# Altium PCB leo_power_pcb.PcbDoc (part 3 of 3)
Units mm, origin at the board's own origin, x right, y up, seen from the top; angles counter-clockwise.
Board outline 127 x 85.5 mm, 4 copper layers (TOP_Layer, INT1_GND, INT2_GND, BOTTOM_Layer), stack 1.586 mm thick; 172 components, 108 nets, 524 pads, 275 vias.
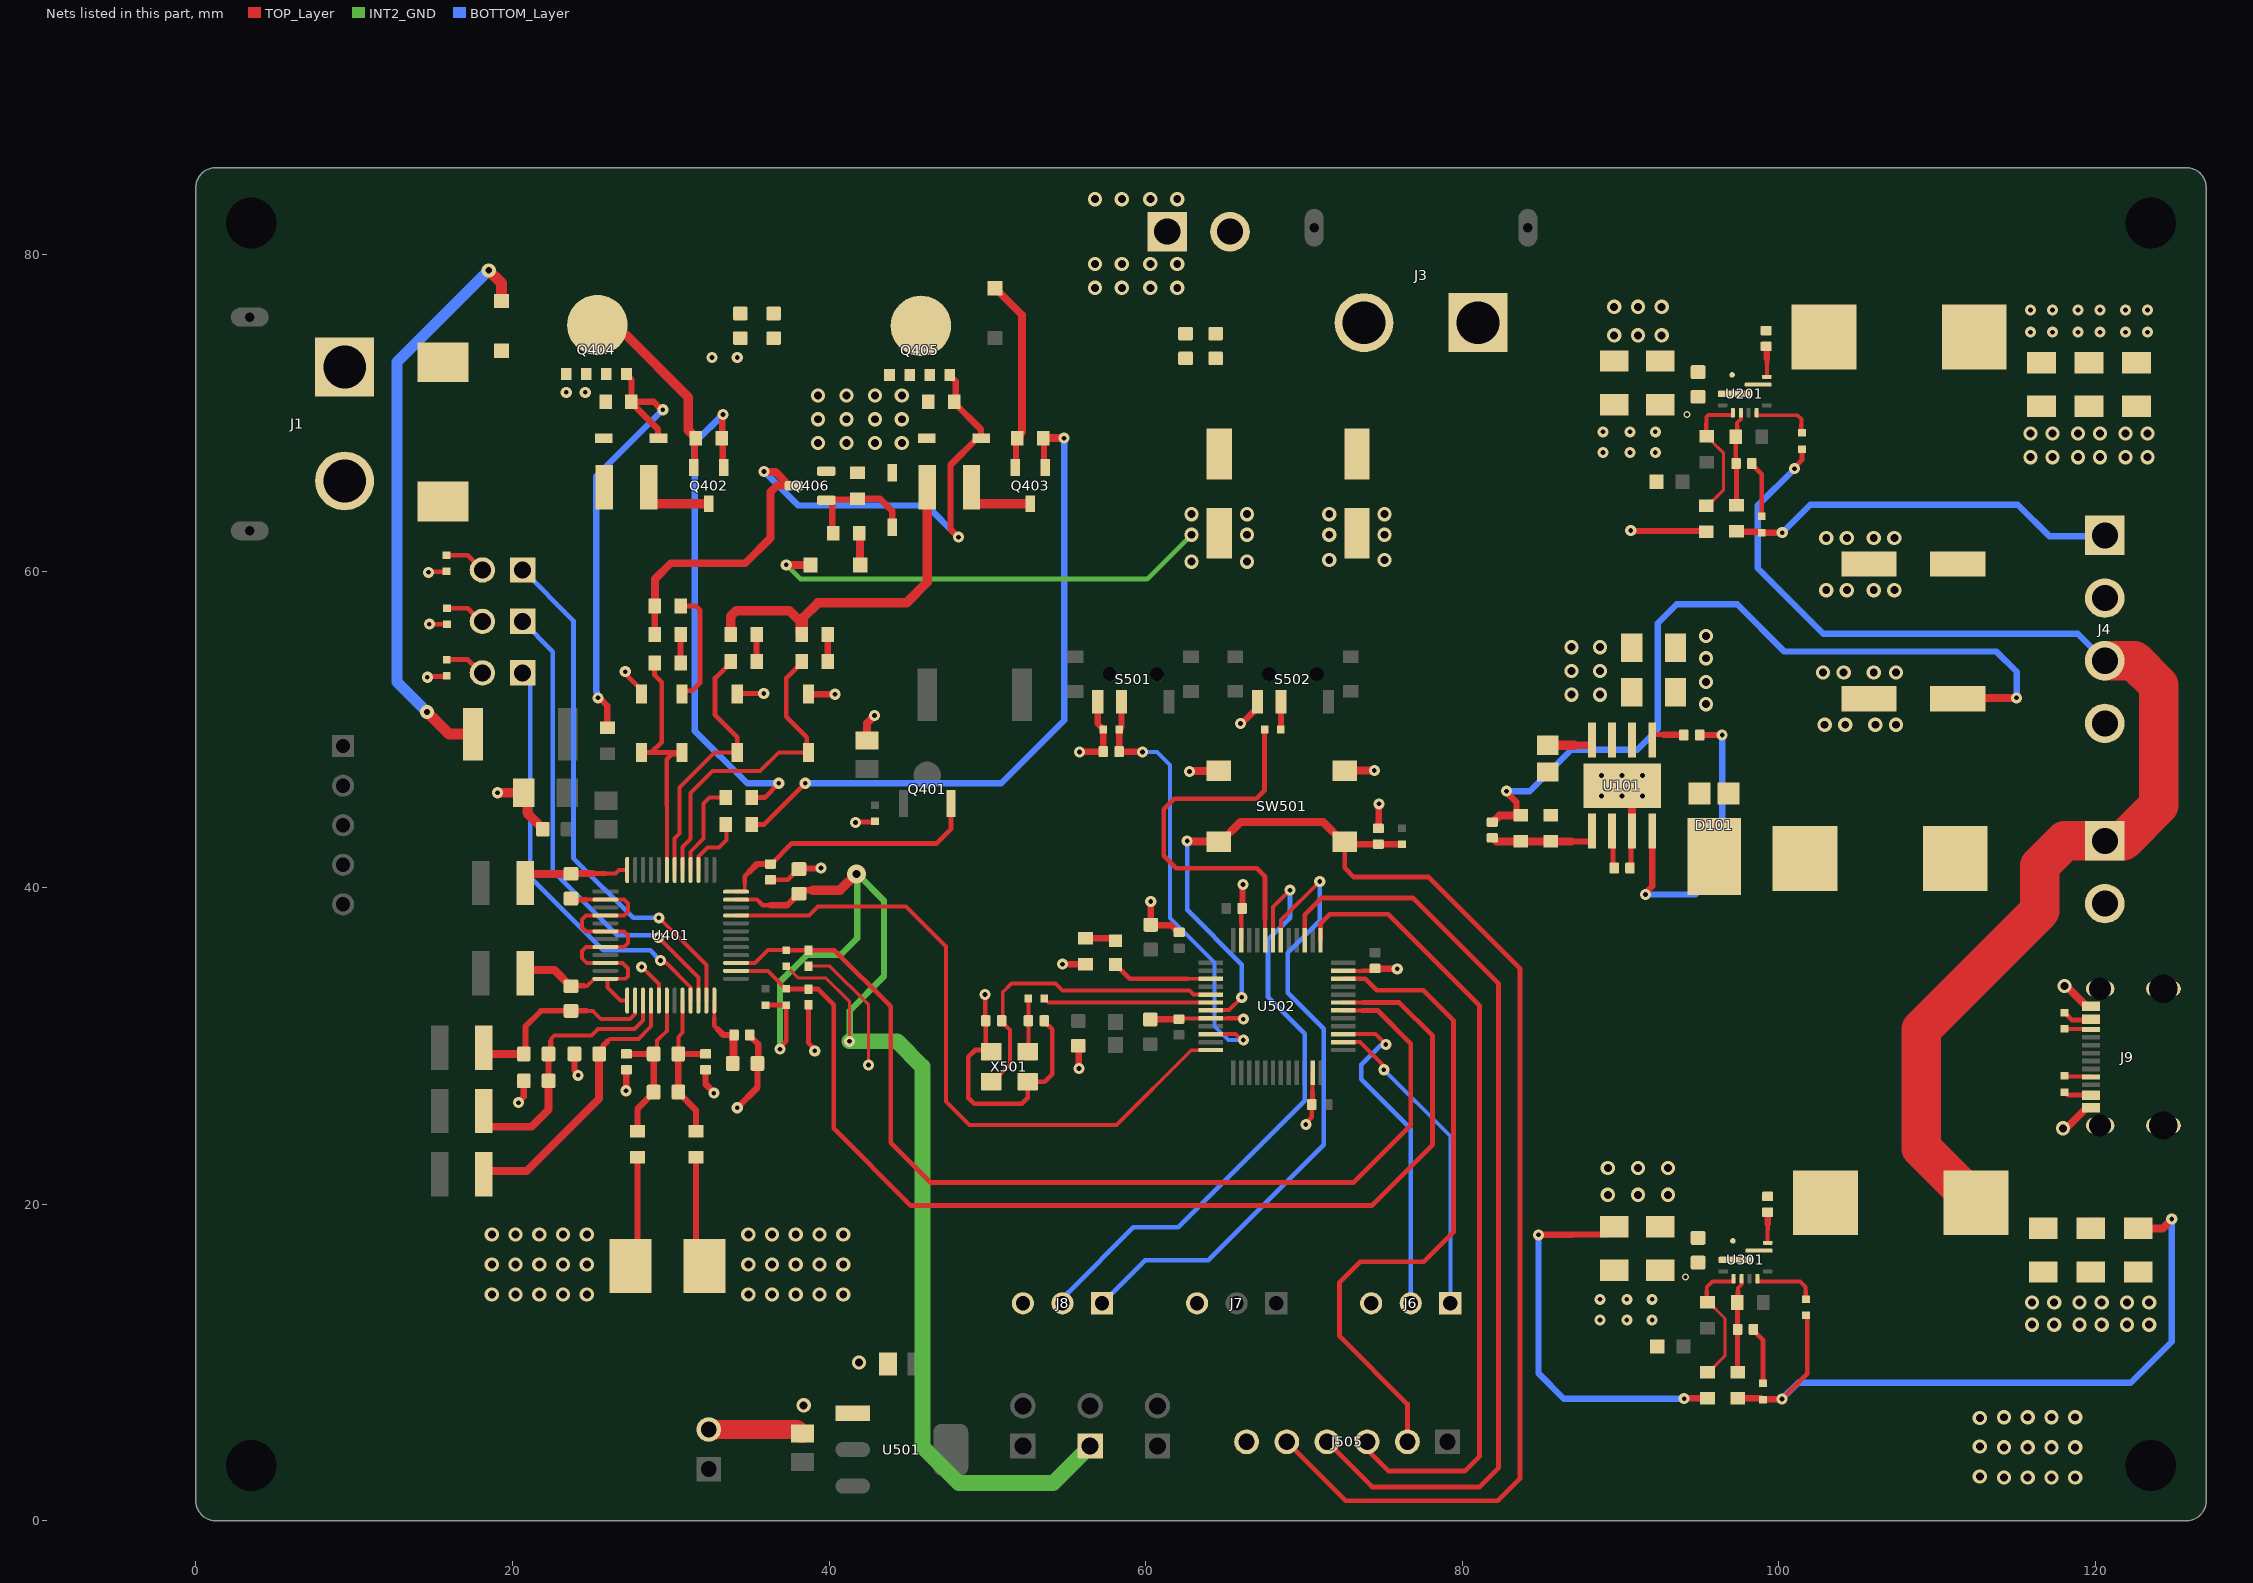
[diagram p4: the nets of this part, all layers, seen from the top]

## Via types
v1: diameter 0.9, hole 0.5, TOP_Layer to BOTTOM_Layer, 147 vias
v2: diameter 0.7, hole 0.3, TOP_Layer to BOTTOM_Layer, 107 vias
v3: diameter 0.5, hole 0.3, TOP_Layer to BOTTOM_Layer, 8 vias
v4: diameter 0.63, hole 0.33, TOP_Layer to BOTTOM_Layer, 6 vias
v5: diameter 0.9, hole 0.4, TOP_Layer to BOTTOM_Layer, 4 vias
v6: diameter 0.45, hole 0.25, TOP_Layer to BOTTOM_Layer, 2 vias
v7: diameter 1.2, hole 0.5, TOP_Layer to BOTTOM_Layer, 1 vias

## Nets (pads, with @x,y where several pads share a name; then routed paths per layer and width w, separated by ;. In a path a pad name is that pad's centre, name@x,y a point inside that pad or via, vN(x,y) a via of type N, cw(c..) or ccw(c..) an arc to the next point about the centre after c; other vN are vias at no path point) (continued)
BM_DSG: D407.2 D408.2 R426.1 U401.43 | length 16.8
  TOP_Layer w0.25: U401.43@29.75,41.125 29.75,45.2
  TOP_Layer w0.3: D408.2@28.15,48.55 28.775,48.55 ; R426.1@28.98,54.2 28.98,53.42 29.425,52.975 29.425,49.2 28.775,48.55 ; 29.75,45.2 29.75,48.114 30.076,48.44 30.59,48.44 D407.2@30.7,48.55 28.775,48.55
BM_LD: D411.2 R431.2 U401.41 | length 20.3
  TOP_Layer w0.25: U401.41@30.75,41.125 30.75,42.575 31.25,43.075 31.25,45.975 32.65,47.375 35.65,47.375 36.825,48.55 D411.2@38.7,48.55
  TOP_Layer w0.3: R431.2@38.28,54.3 38.28,54.23 37.3,53.25 37.3,50.8 38.6,49.5 38.6,48.65 D411.2@38.7,48.55
BM_LD_R: R431.1 R432.2 | length 1.7
  TOP_Layer w0.4: R431.1@39.92,54.3 R432.2@39.92,56
BM_MCU_RX: J8.2 U502.43 | length 39.3
  TOP_Layer w0.25: U502.43@68.05,36.68 68.05,38.775 v2(69.125,39.85)
  BOTTOM_Layer w0.3: J8.2@54.75,13.75 54.75,14.048 55.101,14.398 55.101,14.426 59.225,18.55 62.05,18.55 70.05,26.55 70.05,30.775 67.725,33.1 67.725,36.7 69.125,38.1 v2(69.125,39.85)
BM_MCU_SCL: J6.1 U502.26 | length 19.9
  TOP_Layer w0.25: U502.26@72.48,30.25 73.55,30.25 74.964,28.836 74.964,28.586 v2(75.05,28.5)
  BOTTOM_Layer w0.25: v2(75.05,28.5) 79.25,24.3 J6.1@79.25,13.75
BM_MCU_SDA: J6.2 U502.27 | length 21.4
  TOP_Layer w0.25: U502.27@72.48,30.75 74.525,30.75 v2(75.175,30.1)
  BOTTOM_Layer w0.3: v2(75.175,30.1) 75.098,30.023 74.816,30.023 73.625,28.833 73.625,27.9 76.75,24.775 J6.2@76.75,13.75
BM_MCU_SW: C503.2 R501.2 S501.2 U502.10 | length 28.8
  TOP_Layer w0.25: U502.10@64.12,30.75 65.678,30.75 66.053,30.375 v2(66.175,30.375)
  TOP_Layer w0.4: S501.2@58.475,51.75 58.475,50.151 58.337,50.013 R501.2@58.337,50 58.331,49.994 58.331,48.606 C503.2@58.325,48.6 58.338,48.587 59.787,48.587 v2(59.8,48.575)
  BOTTOM_Layer w0.25: v2(59.8,48.575) 60.725,48.575 61.55,47.75 61.55,38.075 64.35,35.275 64.35,31.25 65.225,30.375 v2(66.175,30.375)
BM_MCU_TX: J8.1 U502.42 | length 41.3
  TOP_Layer w0.25: U502.42@68.55,36.68 68.55,37.95 v2(71,40.4)
  BOTTOM_Layer w0.3: J8.1@57.25,13.75 59.966,16.466 63.966,16.466 71.25,23.75 71.25,31.1 68.975,33.375 68.975,35.9 71,37.925 v2(71,40.4)
BM_PACK: D412.2 R429.2 U401.42 | length 16.6
  TOP_Layer w0.25: U401.42@30.25,41.125 30.25,43.125 30.55,43.425 30.55,46.325 32.775,48.55 D412.2@34.2,48.55
  TOP_Layer w0.3: R429.2@33.78,54.3 33.78,54.23 32.8,53.25 32.8,50.899 34.2,49.499 D412.2@34.2,48.55
BM_PACK_R: R429.1 R430.2 | length 1.7
  TOP_Layer w0.4: R429.1@35.42,54.3 R430.2@35.42,56
BM_PCHG: R416.2 U401.40 | length 6.1
  TOP_Layer w0.25: U401.40@31.25,41.125 31.25,42.275 32.075,43.1 32.075,45.325 32.45,45.7 R416.2@33.48,45.7
BM_PDSG: R422.1 U401.39 | length 4.1
  TOP_Layer w0.25: U401.39@31.75,41.126 31.75,41.975 32.325,42.55 33.05,42.55 33.525,43.025 33.525,43.955 R422.1@33.48,44
BM_REG1: C412.1 J504.1 R406.2 R407.2 R433.2 U401.35 | length 88.5
  TOP_Layer w0.2: R407.2@37.3,35.038 37.313,35.038 38.051,34.3 39.8,34.3 41.3,32.8 v2(41.3,30.3)
  TOP_Layer w0.25: U401.35@34.125,39.25 35.45,39.25 35.6,39.1
  TOP_Layer w0.3: 35.6,39.1 35.8,38.9 36.3,38.9 ; R433.2@36,32.588 R406.2@37.3,32.588 37.3,30.308 36.9,29.908 v2(36.9,29.8)
  TOP_Layer w0.4: 36.3,38.9 37.35,38.9 38.07,39.62 C412.1@38.1,39.62 38.33,39.85 38.975,39.85
  TOP_Layer w0.6: 38.975,39.85 40.7,39.85 v7(41.725,40.875)
  INT2_GND w0.4: v2(36.9,29.8) 36.9,34.05 38.625,35.775 40.75,35.775 41.775,36.8 v7@41.775,40.825 ; v2(41.3,30.3) 41.3,32.225 43.475,34.4 43.475,39.175 v7@41.775,40.875
  INT2_GND w1: v2(41.3,30.3) 44.3,30.3 45.9,28.7 45.9,4.7 48.2,2.4 54.17,2.4 J504.1@56.5,4.73 ; v7(41.725,40.875) v7@41.775,40.875
BM_REG18: C413.2 C414.2 U401.24 | length 4.9
  TOP_Layer w0.25: 32.75,31.775 U401.24@32.75,32.875
  TOP_Layer w0.3: 32.75,31.775 32.75,31.275 33,31.025
  TOP_Layer w0.4: 33,31.025 33.325,30.7 C414.2@34,30.7
  TOP_Layer w0.5: C413.2@33.92,28.9 33.96,28.94 33.96,30.66 C414.2@34,30.7
BM_REGIN: C415.2 Q401.3 U401.36 | length 17.4
  TOP_Layer w0.25: U401.36@34.125,39.75 34.674,39.75 34.675,39.751 34.675,40.3
  TOP_Layer w0.3: 34.675,40.3 34.675,40.725 35,41.05 ; C415.2@36.3,41.5 36.35,41.5 37.65,42.8 46.8,42.8 47.7,43.7 Q401.3@47.7,45.319
  TOP_Layer w0.4: 35,41.05 35.45,41.5 C415.2@36.3,41.5
BM_RST_SHUT: U401.33 U502.12 | length 43.6
  TOP_Layer w0.25: U401.33@34.125,38.25 38.725,38.25 39.3,38.825 44.85,38.825 47.4,36.275 47.4,26.5 48.875,25.025 58.175,25.025 62.885,29.735 64.105,29.735 U502.12@64.12,29.75
BM_SCL: D401.1 R406.1 U401.26 U502.31 | length 69.7
  TOP_Layer w0.25: U401.26@34.125,34.75 36.15,34.75 37.288,33.612 R406.1@37.3,33.612 ; U502.31@72.48,32.75 73.75,32.75
  TOP_Layer w0.3: R406.1@37.3,33.612 37.306,33.606 38.7,33.606 39.294,33.606 40.3,32.6 40.3,24.8 45.175,19.925 74.3,19.925 78.125,23.75 78.125,30.65 76.025,32.75 73.75,32.75
BM_SDA: D402.1 R407.1 U401.27 U502.30 | length 65.9
  TOP_Layer w0.25: U401.27@34.125,35.25 35.325,35.25 36.137,36.062 R407.1@37.3,36.062 ; U502.30@72.48,32.25 73.675,32.25
  TOP_Layer w0.3: R407.1@37.3,36.062 37.306,36.056 38.7,36.056 40.344,36.056 43.9,32.5 43.9,23.9 46.425,21.375 73.125,21.375 76.75,25 76.75,30.15 74.65,32.25 73.675,32.25
BM_SRN: C407.2 C408.2 C409.2 R409.2 U401.20 | length 10.6
  TOP_Layer w0.25: C407.2@30.48,29.5 30.48,30.58 30.75,30.85 U401.20@30.75,32.875
  TOP_Layer w0.4: R409.2@31.6,24.62 31.6,25.95 30.48,27.07 C408.2@30.48,27.1 C407.2@30.48,29.5 C409.2@32.2,29.5
BM_SRP: C406.2 C407.1 C408.1 R408.2 U401.18 | length 10.7
  TOP_Layer w0.25: C407.1@28.92,29.5 29.14,29.72 29.14,30.34 29.75,30.95 U401.18@29.75,32.875
  TOP_Layer w0.4: C406.2@27.2,29.5 C407.1@28.92,29.5 C408.1@28.92,27.1 28.92,27.07 27.9,26.05 R408.2@27.9,24.62
BM_TS1: J402.1 U401.21 | length 27
  TOP_Layer w0.25: v2(29.35,35.4) 29.472,35.4 29.627,35.244 29.72,35.244 31.25,33.715 U401.21@31.25,32.875
  BOTTOM_Layer w0.3: J402.1@20.645,53.575 21.125,53.095 21.125,40.65 25.725,36.05 28.7,36.05 v2(29.35,35.4)
BM_TS1_R: J402.2 R434.2 | length 2.6
  TOP_Layer w0.3: R434.2@15.85,54.412 17.171,54.412 18.008,53.575 J402.2@18.105,53.575
BM_TS2: J401.1 U401.22 | length 30
  TOP_Layer w0.25: v2(29.225,36.85) 31.75,34.325 U401.22@31.75,32.875
  BOTTOM_Layer w0.3: J401.1@20.64,56.825 22.55,54.915 22.55,41.075 26.625,37 28.849,37 28.923,36.927 29.148,36.927 v2(29.225,36.85)
BM_TS2_R: J401.2 R412.2 | length 2.6
  TOP_Layer w0.3: R412.2@15.875,57.662 17.166,57.662 18.003,56.825 J401.2@18.1,56.825
BM_TS3: J403.1 U401.23 | length 33
  TOP_Layer w0.25: v2(29.25,38.1) 29.275,38.1 32.25,35.125 U401.23@32.25,32.875
  BOTTOM_Layer w0.3: J403.1@20.645,60.075 23.85,56.87 23.85,41.875 27.625,38.1 v2(29.25,38.1)
BM_TS3_R: J403.2 R435.2 | length 2.7
  TOP_Layer w0.3: R435.2@15.825,61.012 17.168,61.012 J403.2@18.105,60.075
BM_VC0: C404.2 R405.2 U401.16 | length 17.9
  TOP_Layer w0.25: 26,30.3 26.15,30.45 27.95,30.45 28.75,31.25 U401.16@28.75,32.875
  TOP_Layer w0.35: C404.2@25.48,29.5 25.74,29.76 25.74,30.04 25.8,30.1 26,30.3
  TOP_Layer w0.5: R405.2@18.2,21.9 18.4,22.1 20.9,22.1 25.48,26.68 C404.2@25.48,29.5
BM_VC1: C403.1 C405.2 R404.2 U401.15 | length 17.4
  TOP_Layer w0.25: 22.425,30.275 22.425,30.45 22.65,30.675 25,30.675 25.4,31.075 27.7,31.075 28.25,31.625 U401.15@28.25,32.875
  TOP_Layer w0.35: C403.1@22.28,29.5 22.425,29.645 22.425,30.275
  TOP_Layer w0.4: C405.2@22.28,27.8 C403.1@22.28,29.5
  TOP_Layer w0.5: R404.2@18.2,25.9 18.2,25.2 18.5,24.9 21.2,24.9 22.28,25.98 C405.2@22.28,27.8
BM_VC2: C402.1 C403.2 R403.2 U401.14 | length 13
  TOP_Layer w0.25: 24.675,32.225 25.075,32.225 25.578,31.722 27.437,31.722 27.75,32.035 U401.14@27.75,32.874
  TOP_Layer w0.35: C403.2@20.72,29.5 20.825,29.605 20.825,31.25 21.795,32.22 C402.1@23.7,32.22 23.705,32.225 24.675,32.225
  TOP_Layer w0.5: R403.2@18.2,29.9 18.2,29.8 18.5,29.5 C403.2@20.72,29.5
BM_VC9: C401.1 C402.2 R402.2 U401.2 U401.4 U401.6 U401.8 U401.10 U401.12 U401.13 | length 28.1
  TOP_Layer w0.25: 24.5,33.8 24.723,33.8 25.173,34.25 U401.12@25.875,34.25 U401.12@25.999,34.25 ; 24.621,39.25 U401.2@25.875,39.25 27.05,39.25 27.3,39 27.3,38.5 27.05,38.25 U401.4@25.875,38.25 24.65,38.25 24.4,38 24.4,37.5 24.65,37.25 U401.6@25.875,37.25 27.05,37.25 27.3,37 27.3,36.5 27.05,36.25 U401.8@25.875,36.25 24.65,36.25 24.4,36 24.4,35.546 24.696,35.25 U401.10@25.875,35.25 26.95,35.25 27.3,34.9 27.3,34.4 27.15,34.25 U401.12@25.999,34.25 ; U401.13@27.25,32.875 26.825,32.875 26,33.7 26,34.249 U401.12@25.999,34.25
  TOP_Layer w0.35: C402.2@23.7,33.78 23.72,33.8 24.5,33.8 ; C401.1@23.7,39.32 23.77,39.25 24.62,39.25
  TOP_Layer w0.5: R402.2@20.8,34.6 21,34.8 22.65,34.8 23.67,33.78 C402.2@23.7,33.78
BM_VC10: C401.2 R401.2 U401.48 | length 7
  TOP_Layer w0.25: 25.9,40.9 26.5,40.9 26.725,41.125 U401.48@27.25,41.125
  TOP_Layer w0.3: 25.1,40.9 25.9,40.9
  TOP_Layer w0.45: C401.2@23.7,40.88 23.72,40.9 25.1,40.9
  TOP_Layer w0.5: R401.2@20.8,40.3 20.8,40.58 21.1,40.88 C401.2@23.7,40.88
BMS_VBAT_IN_CAP: C418.2 C419.1
BMS_VBAT_OUT: C1.2 C2.2 C101.1 C102.1 C201.1 C202.1 C203.2 C301.1 C302.1 C303.2 C419.2 C420.2 D406.2 D409.2 J3.1 J10.1 Q405.1 Q405.2 Q405.3 Q406.2 R201.2 R301.2 R421.2 R423.2 R427.2 R430.1 R432.1 U101.2 U101.3 U201.8 U301.8 | length 52.6
  TOP_Layer w0.4: v2(84.825,18.075) 86.918,18.075 86.942,18.099 89.123,18.099 C301.1@89.6,18.576 ; v2(90.65,62.575) 90.685,62.54 95.39,62.54 R201.2@95.425,62.505 ; v2(94.025,7.725) 94.04,7.74 95.485,7.74 R301.2@95.5,7.755
  TOP_Layer w0.6: R430.1@33.78,56 33.78,57.149 34.131,57.5 37.5,57.5 38.185,56.815 38.185,56.095 R432.1@38.28,56 38.375,56.095 38.375,57.075 39.3,58 44.9,58 46.2,59.3 R421.2@46.2,65.3
  BOTTOM_Layer w0.4: v2(84.825,18.075) 84.825,9.325 86.425,7.725 v2(94.025,7.725)
  other v1: 89.2,20.6 91.1,20.6 93,20.6 89.2,22.3 91.1,22.3 93,22.3 86.9,52.2 88.7,52.2 86.9,53.7 88.7,53.7 86.9,55.2 88.7,55.2 39.3,68.1 41.1,68.1 42.9,68.1 44.6,68.1 39.3,69.6 41.1,69.6 42.9,69.6 44.6,69.6 39.3,71.1 41.1,71.1 42.9,71.1 44.6,71.1 89.6,74.9 91.1,74.9 92.6,74.9 89.6,76.7 91.1,76.7 92.6,76.7 56.8,77.9 58.5,77.9 60.3,77.9 62,77.9 56.8,79.4 58.5,79.4 60.3,79.4 62,79.4 56.8,83.5 58.5,83.5 60.3,83.5 62,83.5
BMS_VBAT_OUT_CAP: C420.1 C421.2
BUCK5V1_BOOT: C304.1 U301.7 | length 1.9
  TOP_Layer w0.25: U301.7@99.3,17.57 99.3,18.4
  TOP_Layer w0.3: 99.3,18.4 99.3,18.775
  TOP_Layer w0.4: 99.3,18.775 C304.1@99.3,19.5
BUCK5V1_EN: R301.1 R302.2 U301.1 | length 8.4
  TOP_Layer w0.2: R301.1@95.5,9.395 95.57,9.395 96.6,10.425 96.6,12.79 95.57,13.82 R302.2@95.5,13.82
  TOP_Layer w0.25: 95.45,14.5 95.45,14.775 95.8,15.125 96.975,15.125 97.15,15.125 U301.1@97.15,15.3
  TOP_Layer w0.3: 95.45,14.5 95.45,13.87 R302.2@95.5,13.82
BUCK5V1_FB: C305.1 R305.1 R306.2 U301.2 | length 6
  TOP_Layer w0.25: 97.425,14.5 97.425,14.7 97.65,14.925 U301.2@97.65,15.3
  TOP_Layer w0.3: R305.1@97.4,9.395 C305.1@97.4,12.1 97.39,12.11 97.39,13.79 R306.2@97.38,13.8 97.425,13.845 97.425,14.5
BUCK5V1_FB_CAP: C305.2 R304.1 | length 3.7
  TOP_Layer w0.3: C305.2@98.4,12.1 98.4,12.05 99,11.45 R304.1@99,8.687
BUCK5V1_OUT: C306.1 C307.1 C308.1 J4.3 J5.1 J9.A4B9 J9.B4A9 L301.2 R1.2 R2.2 R203.1 R303.2 R304.2 R305.2 | length 128.8
  TOP_Layer w0.3: v2(100.2,7.7) 101.8,9.3 101.8,12.913 R303.2@101.725,12.988 ; v2(101,66.475) 101,66.551 101.475,67.025 R203.1@101.475,67.713 ; R2.2@118.05,27.088 118.138,27 118.15,27 118.25,26.9 J9.A4B9@119.725,26.9 ; R1.2@118.05,32.112 118.062,32.112 118.525,31.65 119.675,31.65 J9.B4A9@119.725,31.7
  TOP_Layer w0.4: R305.2@97.387,7.742 R305.2@97.4,7.755 98.895,7.755 98.987,7.663 R304.2@99,7.663 99.018,7.682 100.182,7.682 v2(100.2,7.7)
  TOP_Layer w0.5: C308.1@122.7,18.476 124.251,18.476 124.825,19.05 v2(124.825,19.075)
  TOP_Layer w0.9: C307.1@119.7,18.476 119.848,18.476 C307.1@120.075,18.703
  TOP_Layer w2.5: L301.2@112.45,20.1 109,23.55 109,31.05 116.5,38.55 116.5,41.4 118.06,42.96 121.76,42.96 124,45.2 124,52.8 122.46,54.34 J4.3@120.6,54.34
  BOTTOM_Layer w0.4: v2(100.2,7.7) 101.225,8.725 122.225,8.725 124.825,11.325 v2(124.825,19.075) ; v2(101,66.475) 98.675,64.15 98.675,60.175 102.8,56.05 118.89,56.05 J4.3@120.6,54.34
BUCK5V1_PG: R303.1 U301.4 | length 4.1
  TOP_Layer w0.25: U301.4@98.65,15.3 98.65,15.125 99.1,15.125 101.35,15.125 101.7,14.775 101.7,14.525
  TOP_Layer w0.3: 101.7,14.525 101.7,14.037 R303.1@101.725,14.012
BUCK5V1_SW: C304.2 L301.1 U301.6
BUCK6V_BOOT: C104.2 U101.1 | length 2.3
  TOP_Layer w0.3: U101.1@92.005,49.325 92.005,49.575 92.105,49.675 92.725,49.675
  TOP_Layer w0.4: 92.725,49.675 93.975,49.675 C104.2@94,49.65
BUCK6V_FB: C105.1 R102.1 R103.2 U101.5 | length 7
  TOP_Layer w0.4: 86.9,42.925 88.145,42.925 88.195,42.975 U101.5@88.195,43.575
  TOP_Layer w0.5: C105.1@81.9,43.15 81.95,43.15 82.17,42.93 R102.1@83.7,42.93 R103.2@85.6,42.93 85.605,42.925 86.9,42.925
BUCK6V_OUT: C105.2 C106.2 C107.2 J4.2 L101.2 R102.2 | length 52.2
  TOP_Layer w0.4: v2(82.8,46.1) 82.8,46.026 83.435,45.391 83.435,44.765 R102.2@83.63,44.57 ; R102.2@83.7,44.57 R102.2@83.63,44.57 ; R102.2@83.77,44.57 R102.2@83.63,44.57
  TOP_Layer w0.5: C105.2@81.9,44.15 81.95,44.15 82.37,44.57 R102.2@83.63,44.57 ; C106.2@111.3,51.95 111.35,52 v2(115.025,52)
  BOTTOM_Layer w0.4: v2(82.8,46.1) 84.275,46.1 86.9,48.725 91.05,48.725 92.35,50.025 92.35,56.7 93.55,57.9 97.375,57.9 100.35,54.925 113.75,54.925 115.025,53.65 v2(115.025,52)
BUCK6V_RT: R101.1 U101.4 | length 3.1
  TOP_Layer w0.5: 87.1,49 88.195,49 U101.4@88.195,49.325
  TOP_Layer w0.6: R101.1@85.401,49 87.1,49
BUCK6V_SS: C103.2 U101.6 | length 2.4
  TOP_Layer w0.3: U101.6@89.465,43.575 89.532,43.508 89.532,41.317 C103.2@89.6,41.25
BUCK6V_SW: C104.1 D101.3 L101.1 U101.8 | length 19.5
  TOP_Layer w0.4: v2(91.575,39.575) 91.575,39.656 92.005,40.086 U101.8@92.005,43.575 ; C104.1@95,49.65 v2(96.425,49.65)
  BOTTOM_Layer w0.4: v2(91.575,39.575) 94.725,39.575 96.425,41.275 v2(96.425,49.65)
BUCK12V_BOOT: C204.1 U201.7 | length 1.9
  TOP_Layer w0.25: U201.7@99.25,72.28 99.25,73.125
  TOP_Layer w0.3: 99.25,73.125 99.25,73.45
  TOP_Layer w0.4: C204.1@99.2,74.2 99.25,74.15 99.25,73.45
BUCK12V_EN: R201.1 R202.2 U201.1 | length 8.5
  TOP_Layer w0.2: R201.1@95.425,64.145 95.72,64.44 95.84,64.44 96.5,65.1 96.5,67.47 95.815,68.155 95.815,68.225 95.52,68.52 R202.2@95.45,68.52
  TOP_Layer w0.25: 95.425,69.35 95.425,69.729 95.571,69.875 97.1,69.875 U201.1@97.1,70.01
  TOP_Layer w0.3: 95.425,69.35 95.425,68.545 R202.2@95.45,68.52
BUCK12V_FB: C205.1 R205.1 R206.2 U201.2 | length 6
  TOP_Layer w0.25: 97.375,69.175 97.375,69.375 97.6,69.6 U201.2@97.6,70.01
  TOP_Layer w0.3: R205.1@97.325,64.17 97.325,66.775 C205.1@97.3,66.8 97.29,66.81 97.29,68.49 R206.2@97.28,68.5 97.375,68.595 97.375,69.175
BUCK12V_FB_CAP: C205.2 R204.2 | length 3.6
  TOP_Layer w0.3: C205.2@98.3,66.8 98.3,66.75 98.925,66.125 R204.2@98.925,63.462
BUCK12V_OUT: C206.1 C207.1 C208.1 J4.1 L201.2 R204.1 R205.2 | length 24.9
  TOP_Layer w0.3: R205.2@97.325,62.53 R205.2@97.371,62.484 ; R204.1@98.879,62.484 R204.1@98.925,62.438
  TOP_Layer w0.4: R205.2@97.313,62.517 R205.2@97.325,62.53 ; R205.2@97.371,62.484 R204.1@98.879,62.484 ; R204.1@98.925,62.438 98.931,62.431 v2(100.219,62.431)
  BOTTOM_Layer w0.4: v2(100.219,62.431) 101.987,64.2 115.1,64.2 117.1,62.2 120.54,62.2 J4.1@120.6,62.26
  other v2: 115.9,75.1 117.3,75.1 118.9,75.1 120.3,75.1 121.9,75.1 123.3,75.1 115.9,76.5 117.3,76.5 118.9,76.5 120.3,76.5 121.9,76.5 123.3,76.5
BUCK12V_PG_5V_IN: R203.2 U201.4 | length 4
  TOP_Layer w0.25: U201.4@98.6,70.01 98.6,69.85 101.175,69.85 101.425,69.6 101.425,69.275
  TOP_Layer w0.3: 101.425,69.275 101.425,68.787 R203.2@101.475,68.737
BUCK12V_SW: C204.2 L201.1 U201.6
C_GATE: D405.1 Q404.4 R418.1 R419.2 | length 29.2
  TOP_Layer w0.4: v2(25.4,52) 25.5,52 26,51.5 R419.2@26,50.12 ; Q404.4@27.205,72.448 27.205,72.41 27.52,72.095 R418.1@27.52,70.7 ; D405.1@29.225,68.4 29.2,68.425 29.2,68.95 27.52,70.63 R418.1@27.52,70.7 ; v2(29.5,70.2) 29.419,70.2 28.919,70.7 R418.1@27.52,70.7
  BOTTOM_Layer w0.4: v2(25.4,52) 25.343,52.057 25.343,52.357 25.3,52.4 25.3,66 v2(29.5,70.2)
D_GATE: D406.1 Q405.4 Q406.3 R423.1 R424.2 R425.2 | length 44.7
  TOP_Layer w0.3: D406.1@49.37,68.4 D406.1@49.625,68.4
  TOP_Layer w0.4: R424.2@28.98,56 R425.2@28.98,57.8 ; Q405.4@47.635,72.398 47.635,72.36 48,71.995 48,70.78 R423.1@47.92,70.7 47.92,70.63 49.6,68.95 49.6,68.425 D406.1@49.625,68.4 ; v2(48.175,62.15) 47.675,62.65 47.675,66.705 D406.1@49.37,68.4
  TOP_Layer w0.5: R425.2@28.98,57.8 29,57.82 29,59.5 30,60.5 34.7,60.5 36.3,62.1 36.3,65 36.7,65.4 Q406.3@37.49,65.4 ; v2(35.9,66.3) 35.938,66.262 36.628,66.262 Q406.3@37.49,65.4 ; Q406.3@37.775,65.4 Q406.3@37.49,65.4
  BOTTOM_Layer w0.4: v2@35.903,66.3 38.053,64.15 46.175,64.15 v2(48.175,62.15)
D_GATE_D: D407.1 R425.1 | length 7.4
  TOP_Layer w0.3: R425.1@30.62,57.8 31.575,57.8 31.85,57.525 31.85,52.95 31.35,52.45 30.9,52.45 D407.1@30.7,52.25
D_GATE_R: R424.1 R426.2 | length 1.8
  TOP_Layer w0.4: R426.2@30.62,54.2 R424.1@30.62,56
FET_CD: D404.2 Q402.2 Q403.2 Q404.5-6-7-8 Q405.5-6-7-8 R417.2 R420.2 | length 24.6
  TOP_Layer w0.4: Q402.2@31.45,66.55 31.515,66.615 31.515,68.335 R417.2@31.58,68.4 ; Q403.2@51.75,66.55 51.815,66.615 51.815,68.335 R420.2@51.88,68.4
  TOP_Layer w0.5: D404.2@50.5,77.875 50.525,77.875 50.725,77.675 50.725,77.65 52.2,76.175 52.2,68.79 51.88,68.47 R420.2@51.88,68.4
  TOP_Layer w0.6: Q404.5-6-7-8@25.37,75.55 25.986,74.934 27.166,74.934 31.1,71 31.1,68.916 31.451,68.565 31.485,68.565 31.58,68.47 R417.2@31.58,68.4
GND: C1.1 C2.1 C101.2 C102.2 C103.1 C106.1 C107.1 C201.2 C202.2 C203.1 C206.2 C207.2 C208.2 C301.2 C302.2 C303.1 C306.2 C307.2 C308.2 C421.1 C501.2 C502.2 C503.1 C504.1 C505.1 C506.1 C507.1 C508.1 C509.1 C510.1 C511.1 C512.1 C513.1 C514.1 D101.1 D101.2 D401.2 D402.2 D410.1 J3.2 J4.4 J5.2 J6.3 J7.3 J8.3 J9.A1B12 J9.B1A12 J9.S1 J9.S2 J9.S3 J9.S4 J10.2 J501.2 J505.6 NT201.1 NT301.1 R101.2 R103.1 R409.1 R410.2 R501.1 R502.1 S501.3 S502.3 SW501.1 SW501.2 U101.7 U101.9 U201.9 U301.9 U501.1 U502.8 U502.23 U502.35 U502.47 X501.2 X501.4 | length 116.6
  TOP_Layer w0.2: D402.2@38.7,35.05 40.05,35.05 42.5,32.6 v2(42.5,28.8)
  TOP_Layer w0.25: C512.1@62.1,31.7 62.135,31.735 64.105,31.735 U502.8@64.12,31.75 65.175,31.75 ; U502.47@66.05,36.68 66.05,37.775 ; 70.55,27.125 U502.23@70.55,28.32 ; U502.35@72.48,34.75 73.675,34.75
  TOP_Layer w0.3: D401.2@38.7,32.6 38.7,30.208 39.1,29.808 v2(39.1,29.7) ; v2(49.85,33.25) 49.875,33.225 49.875,31.625 C506.1@49.9,31.6 49.9,30 X501.2@50.15,29.75 ; X501.2@50.25,29.65 X501.2@50.15,29.75 ; C505.1@53.6,31.6 53.6,31.55 54.1,31.05 54.1,28.225 53.625,27.75 X501.4@52.55,27.75 52.55,26.725 52.175,26.35 49.175,26.35 48.8,26.725 48.8,29.325 49.225,29.75 X501.2@50.15,29.75 ; 65.175,31.75 66.125,31.75 v2(66.175,31.7) ; 66.05,37.775 66.05,38.65 C509.1@66.1,38.7 ; v2(70.125,25.05) 70.125,25.125 70.5,25.5 C508.1@70.5,26.3 70.55,26.35 70.55,27.125 ; 73.675,34.75 74.35,34.75 C507.1@74.5,34.9 ; C103.1@90.6,41.25 90.667,41.317 90.667,43.508 U101.7@90.735,43.575
  TOP_Layer w0.4: R409.1@31.6,22.98 31.6,16.64 R410.2@32.14,16.1 ; v2(54.75,35.175) 54.753,35.178 56.198,35.178 R502.1@56.2,35.18 ; C514.1@55.75,30.02 55.775,29.995 55.775,28.6 v2(55.8,28.575) ; v2(55.825,48.575) 55.837,48.588 57.312,48.588 C503.1@57.325,48.6 57.319,48.606 57.319,49.994 R501.1@57.313,50 57.313,50.013 56.975,50.351 S501.3@56.975,51.75 ; C513.1@60.3,31.68 60.31,31.69 62.09,31.69 C512.1@62.1,31.7 ; v2(60.325,39.125) C511.1@60.325,37.655 60.355,37.625 61.625,37.625 62.075,37.175 C510.1@62.125,37.175 ; v2(66,50.375) 66.081,50.375 67.06,51.354 S502.3@67.06,51.754 ; C509.1@66.1,38.7 66.125,38.725 66.125,40.175 v2(66.15,40.2) ; C507.1@74.5,34.9 74.513,34.887 75.888,34.887 v2(75.9,34.875) ; C504.1@74.7,43.75 74.725,43.775 74.725,45.275 v2(74.75,45.3)
  TOP_Layer w0.5: v2(37.3,60.4) D410.1@38.825,60.4 ; v2(62.775,47.35) 62.8,47.375 64.6,47.375 SW501.1@64.625,47.4 ; SW501.2@72.575,47.4 v2(74.45,47.4) ; U101.9@90.1,46.45 90.735,45.815 U101.7@90.735,43.575 ; v1(117.95,24.8) 118.027,24.877 118.227,24.877 119.45,26.1 J9.A1B12@119.725,26.1 ; v1(118.05,33.8) 118.088,33.762 118.188,33.762 119.45,32.5 J9.B1A12@119.725,32.5
  TOP_Layer w1.2: J501.2@32.4,5.775 37.975,5.775 38.225,5.525 C501.2@38.325,5.525
  INT2_GND w0.3: v2(37.3,60.4) 38.2,59.5 60.1,59.5 v1(62.9,62.3)
  other v1: 114.225,2.75 115.725,2.75 117.225,2.75 118.725,2.75 112.7,2.8 114.225,4.65 115.725,4.65 117.225,4.65 118.725,4.65 112.7,4.7 112.7,6.5 114.225,6.55 115.725,6.55 117.225,6.55 118.725,6.55 38.4,7.3 41.9,10 116,12.4 117.4,12.4 119,12.4 120.4,12.4 122,12.4 123.4,12.4 116,13.8 117.4,13.8 119,13.8 120.4,13.8 122,13.8 123.4,13.8 34.9,14.3 36.4,14.3 37.9,14.3 39.4,14.3 40.9,14.3 34.9,16.2 36.4,16.2 37.9,16.2 39.4,16.2 40.9,16.2 34.9,18.1 36.4,18.1 37.9,18.1 39.4,18.1 40.9,18.1 102.9,50.3 104.2,50.3 106.1,50.3 107.4,50.3 95.4,51.6 95.4,53 102.8,53.6 104.1,53.6 106,53.6 107.4,53.6 95.4,54.5 95.4,55.9 103,58.8 104.3,58.8 106,58.8 107.3,58.8 62.9,60.6 66.4,60.6 71.6,60.7 75.1,60.7 103,62.1 104.3,62.1 106,62.1 107.3,62.1 66.4,62.3 71.6,62.3 75.1,62.3 62.9,63.6 66.4,63.6 71.6,63.6 75.1,63.6 115.9,67.2 117.3,67.2 118.9,67.2 120.3,67.2 121.9,67.2 123.3,67.2 115.9,68.7 117.3,68.7 118.9,68.7 120.3,68.7 121.9,68.7 123.3,68.7
  other v2: 88.7,12.7 90.4,12.7 92,12.7 88.7,14 90.4,14 92,14 88.9,67.5 90.6,67.5 92.2,67.5 88.9,68.8 90.6,68.8 92.2,68.8
  other v4: 88.8,45.8 90.1,45.8 91.4,45.8 88.8,47.1 90.1,47.1 91.4,47.1
  other v6: 94.1,15.4 94.2,69.9
MCU_BOOT0: R505.2 U502.44 | length 24.6
  TOP_Layer w0.25: U502.44@67.55,36.68 67.55,38
  TOP_Layer w0.3: R505.2@67.513,50 67.513,46.163 66.975,45.625 61.825,45.625 61.15,44.95 61.15,42.025 61.95,41.225 67.025,41.225 67.55,40.7 67.55,38
MCU_BOOT0_R: R505.1 S502.2 | length 1.8
  TOP_Layer w0.4: R505.1@68.537,50 68.548,50.012 68.548,51.743 S502.2@68.56,51.754
MCU_LED: D501.2 U502.3 | length 6.4
  TOP_Layer w0.25: 62.65,34.25 U502.3@64.12,34.25
  TOP_Layer w0.3: D501.2@58.1,35.15 59,34.25 62.65,34.25
MCU_LED_R: D501.1 R502.2 | length 2
  TOP_Layer w0.3: D501.1@57.875,36.725 57.95,36.65 D501.1@58.1,36.65
  TOP_Layer w0.4: R502.2@56.2,36.82 57.78,36.82 D501.1@57.875,36.725
MCU_NRST: C504.2 J505.5 R503.1 SW501.3 SW501.4 U502.7 | length 92.7
  TOP_Layer w0.25: U502.7@64.12,32.25 64.135,32.265 65.265,32.265 v2(66.075,33.075)
  TOP_Layer w0.3: J505.5@68.92,5 72.645,1.275 82.25,1.275 83.65,2.675 83.65,34.9 77.875,40.675 73.15,40.675 72.575,41.25 SW501.4@72.575,42.9
  TOP_Layer w0.4: SW501.4@72.575,42.9 72.725,42.75 C504.2@74.7,42.75 74.706,42.744 76.194,42.744 R503.1@76.2,42.738
  TOP_Layer w0.5: v2(62.625,42.95) 62.65,42.925 64.6,42.925 SW501.3@64.625,42.9 64.75,42.9 66,44.15 71.2,44.15 72.45,42.9 SW501.4@72.575,42.9
  BOTTOM_Layer w0.3: v2(62.625,42.95) 62.625,38.6 66.075,35.15 v2(66.075,33.075)
MCU_OSC_IN: C506.2 U502.5 X501.3 | length 20.1
  TOP_Layer w0.25: X501.3@50.25,27.75 50.35,27.75 51.425,28.825 51.425,31.025 50.9,31.55 C506.2@50.9,31.6 50.975,31.675 50.975,33.4 51.525,33.95 54.3,33.95 54.75,33.5 62.775,33.5 63.025,33.25 U502.5@64.12,33.25
MCU_OSC_OUT: R504.2 U502.6 | length 10.6
  TOP_Layer w0.25: R504.2@53.612,33 53.612,32.988 53.85,32.75 U502.6@64.12,32.75
MCU_SWCLK: J505.3 U502.37 | length 50.8
  TOP_Layer w0.3: U502.37@71.05,36.68 71.05,37.75 71.625,38.325 75.325,38.325 81.1,32.55 81.1,4.1 80.15,3.15 75.35,3.15 74.243,4.257 74.243,4.757 J505.3@74,5
MCU_SWDIO: J505.2 U502.34 | length 41.8
  TOP_Layer w0.3: U502.34@72.48,34.25 73.875,34.25 74.6,33.525 77.55,33.525 79.45,31.625 79.45,18.25 77.575,16.375 73.55,16.375 72.25,15.075 72.25,11.675 76.54,7.385 J505.2@76.54,5
MCU_SWO: J505.4 U502.39 | length 59.7
  TOP_Layer w0.3: U502.39@70.05,36.68 70.05,38.3 71.1,39.35 76.9,39.35 82.3,33.95 82.3,3.35 81.1,2.15 74.31,2.15 J505.4@71.46,5
MXC_P: D403.2 F401.1 J1.1
MXC_P_D: D403.1 R411.1 | length 36.8
  TOP_Layer w0.7: v5(14.6,51.1) 16,49.7 R411.1@17.51,49.7 ; v5(18.5,79) 19.3,78.2 D403.1@19.3,77.075
  BOTTOM_Layer w0.7: v5(14.6,51.1) 12.7,53 12.7,73.2 v5(18.5,79)
MXC_P_F: C418.1 D405.2 F401.2 Q404.1 Q404.2 Q404.3 R415.1 R418.2
  other v2: 23.4,71.3 24.6,71.3 32.6,73.5 34.2,73.5
P_C_DRAIN: Q402.3 R415.2 | length 4.7
  TOP_Layer w0.4: R415.2@28.6,65.3 28.6,65.2 R415.2@28.7,65.1
  TOP_Layer w0.5: R415.2@28.7,65.1 28.7,64.45 R415.2@28.9,64.25
  TOP_Layer w0.6: R415.2@28.9,64.25 Q402.3@32.4,64.25
P_C_GATE: Q402.1 R416.1 R417.1 | length 32.9
  TOP_Layer w0.3: R416.1@35.12,45.7 35.925,45.7 v2(36.825,46.6)
  TOP_Layer w0.4: v2(33.3,69.9) 33.26,69.86 33.26,68.44 R417.1@33.22,68.4 33.285,68.335 33.285,66.615 Q402.1@33.35,66.55
  BOTTOM_Layer w0.4: v2(33.3,69.9) 31.525,68.125 31.525,49.9 34.825,46.6 v2(36.825,46.6)
P_D_DRAIN: Q403.3 R421.1 | length 4.6
  TOP_Layer w0.5: R421.1@49,65.3 49,64.55 R421.1@49.3,64.25
  TOP_Layer w0.6: R421.1@49.3,64.25 Q403.3@52.7,64.25
P_D_GATE: Q403.1 R420.1 R422.2 | length 43.5
  TOP_Layer w0.3: R422.2@35.12,44 35.9,44 v2(38.5,46.6)
  TOP_Layer w0.4: R420.1@53.52,68.4 53.585,68.335 53.585,66.615 Q403.1@53.65,66.55
  TOP_Layer w0.5: R420.1@53.52,68.4 v2(54.85,68.4)
  BOTTOM_Layer w0.4: v2(38.5,46.6) 50.875,46.6 54.85,50.575 v2(54.85,68.4)
REV_PROTECT_GATE: D409.1 Q406.1 R427.1 R428.2 | length 8
  TOP_Layer w0.4: R428.2@40.28,62.4 40.2,62.48 40.2,64.38 40.095,64.485 Q406.1@39.825,64.485 39.872,64.532 41.752,64.532 R427.1@41.8,64.58 43.22,64.58 44,63.8 D409.1@44,62.775
REV_PROTECT_RD: D410.2 R428.1 | length 2
  TOP_Layer w0.5: R428.1@41.92,62.4 41.947,62.372 41.947,60.427 D410.2@41.975,60.4
USBS_CC1: J9.A5 R2.1 | length 1.7
  TOP_Layer w0.25: R2.1@118.05,28.112 118.087,28.075 119.7,28.075 J9.A5@119.725,28.05
USBS_CC2: J9.B5 R1.1 | length 1.7
  TOP_Layer w0.25: R1.1@118.05,31.088 118.069,31.069 119.706,31.069 J9.B5@119.725,31.05
VSS: C404.1 C405.1 C406.1 C409.1 C410.2 C411.1 C412.2 C413.1 C414.1 C415.1 C416.2 D408.1 D411.1 D412.1 J1.2 R408.1 R410.1 R412.1 R414.1 R434.1 R435.1 U401.17 | length 40.7
  TOP_Layer w0.25: v2(28.165,35) 28.686,34.479 29.25,33.915 U401.17@29.25,32.875
  TOP_Layer w0.3: v2(14.625,53.3) 14.669,53.344 15.806,53.344 R434.1@15.85,53.388 ; v2(14.7,59.925) 14.731,59.956 15.793,59.956 R435.1@15.825,59.988 ; v2(14.75,56.65) 14.756,56.644 15.869,56.644 R412.1@15.875,56.638 ; v2(27.125,53.65) 27.202,53.573 27.202,53.448 28.15,52.5 D408.1@28.15,52.25 ; D412.1@34.2,52.25 34.225,52.275 v2(35.875,52.275) ; C415.1@36.3,40.5 37.39,40.5 38.07,41.18 C412.2@38.1,41.18 ; v2(41.675,44.125) 41.707,44.156 42.868,44.156 R414.1@42.9,44.188
  TOP_Layer w0.4: v2(20.375,26.425) 20.375,26.453 20.72,26.798 C405.1@20.72,27.8 ; C404.1@23.92,29.5 23.92,28.461 24.15,28.231 v2(24.15,28.15) ; v2(27.175,27.175) 27.188,27.188 27.188,28.488 C406.1@27.2,28.5 ; R410.1@27.46,16.1 27.9,16.54 R408.1@27.9,22.98 ; C409.1@32.2,28.5 32.2,27.6 32.725,27.075 v2(32.725,27.025) ; v2(34.2,26.1) 35.48,27.38 C413.1@35.48,28.9 35.525,28.945 35.525,30.125 35,30.65 C414.1@35,30.7 ; C412.2@38.1,41.18 38.135,41.215 39.465,41.215 v2(39.5,41.25) ; D411.1@38.7,52.25 38.725,52.225 v2(40.375,52.225)
  TOP_Layer w0.5: C416.2@42.4,49.3 42.4,50.4 v2(42.875,50.875)
  TOP_Layer w0.6: v2(19.05,46) C410.2@20.724,46 20.925,45.799 20.925,44.725 21.92,43.73 C411.1@21.92,43.7
  other v1: 18.7,14.3 20.2,14.3 21.7,14.3 23.2,14.3 24.7,14.3 18.7,16.2 20.2,16.2 21.7,16.2 23.2,16.2 24.7,16.2 18.7,18.1 20.2,18.1 21.7,18.1 23.2,18.1 24.7,18.1
XTAL_IN: C505.2 R504.1 X501.1 | length 3.4
  TOP_Layer w0.25: X501.1@52.55,29.65 52.6,29.7 C505.2@52.6,31.6 52.594,31.606 52.594,32.994 R504.1@52.588,33
pads on no net: J1.S1 J1.S2 J3.S1 J3.S2 J9.A6 J9.A7 J9.A8 J9.B6 J9.B7 J9.B8 S501. S501.SH1 S501.SH2 S501.SH3 S501.SH4 S502. S502.SH1 S502.SH2 S502.SH3 S502.SH4 U201.5 U201.10 U301.5 U301.10 U401.1 U401.3 U401.5 U401.7 U401.9 U401.11 U401.19 U401.28 U401.34 U401.38 U401.44 U502.4 U502.11 U502.15 U502.16 U502.18 U502.21 U502.22 U502.25 U502.28 U502.29 U502.32 U502.33 U502.38 U502.41 U502.45 U502.46

## Polygon pours and split planes (outlines as drawn)
BUCK5V1_OUT on TOP_Layer "BUCK5V1_OUT_L01_P070" (solid, pour order 70): 122.3,31.95 123,31.25 123,27.325 122.325,26.65 119.125,26.65 119.125,27.15 121.2,27.15 121.925,27.875 121.925,30.625 121.1,31.45 119.125,31.45 119.125,31.95
GND on TOP_Layer "GND_L01_P034" (solid, pour order 34): 61.975,64.25 82.575,64.25 87.85,69.525 87.85,71.025 88.125,71.3 94.125,71.3 94.35,71.525 95.975,71.525 96.125,71.675 97.2,71.675 97.475,71.4 98.225,71.4 98.225,71 95.917,71 94.317,69.4 92.75,69.4 92.75,66.825 92.6,66.675 92.6,60.775 102.4,60.775 102.4,69.975 114.375,69.975 115.6,71.2 123.825,71.2 124.325,70.7 124.325,66.511 123.714,65.9 109.2,65.9 108,64.7 108,48.25 106.7,46.95 99.45,46.95 97.7,45.2 92.7,45.2 92.55,45.05 87.025,45.05 86.075,44.1 85.075,44.1 85,44.175 85,46.2 84.525,46.675 84.525,47.85 84.65,47.975 87.525,47.975 87.65,47.85 93.65,47.85 94.25,48.45 97.15,48.45 97.6,48.9 97.6,50.125 96.85,50.875 93.125,50.875 92.65,51.35 92.65,57.375 91.475,58.55 62.625,58.55 60.95,60.225 60.95,63.15
BMS_VBAT_OUT on TOP_Layer "BMS_VBAT_OUT_L01_P027" (solid, pour order 27): 61.8,84.8 62.8,83.8 62.8,75.7 63.1,75.4 63.1,74.5 61.5,74.5 60.8,73.8 60.8,71.5 61.5,70.8 76.5,70.8 78.6,72.9 78.6,83 80.4,84.8 95.4,84.8 98.235,81.965 98.235,72.175 95.475,72.175 95.4,72.1 93.9,72.1 93.46,72.54 87.14,72.54 80.2,65.6 60.5,65.6 55.4,70.7 55.4,83.4 56.8,84.8
+3V3_EXT on TOP_Layer "+3V3_EXT_L01_P056" (solid, pour order 56): 49,2.975 48.525,2.5 46.675,2.5 45.2,3.975 40.475,3.975 40.25,4.2 40.25,4.825 40.6,5.175 43.875,5.175 44.9,6.2 44.9,10.875 45.15,11.125 46.125,11.125 46.725,10.525 46.725,8.175 49,5.9
+5V_EXT on TOP_Layer "+5V_EXT_L01_P053" (solid, pour order 53): 37.575,4.375 39.05,4.375 39.275,4.15 39.275,3.35 39.85,2.775 42.475,2.775 42.775,2.475 42.775,1.85 42.475,1.55 42.45,1.575 38.05,1.575 37.375,2.25 37.375,4.1
GND on TOP_Layer "GND_L01_P052" (solid, pour order 52): 37.371,4.9 39.2,4.9 39.8,5.5 39.8,5.9 40.2,6.3 42.7,6.3 43.6,7.2 43.6,8.1 44.4,8.9 44.4,10.8 43.8,11.4 40.2,11.4 37.1,8.3 37.1,5.375
VSS on TOP_Layer "VSS_L01_P049" (solid, pour order 49): 28.9,18.2 26.1,18.2 25,19.3 18.7,19.3 17.6,18.2 17.6,13.8 18.9,12.5 24.8,12.5 24.8,12.6 26.2,14 28.9,14
GND on TOP_Layer "GND_L01_P048" (solid, pour order 48): 30.7,18.2 33.3,18.2 34.5,19.4 40.9,19.4 41.8,18.5 41.8,13.8 40.825,12.825 34.275,12.825 33.2,13.9 30.7,13.9
GND on TOP_Layer "GND_L01_P047" (solid, pour order 47): 87.85,16.6 94.125,16.6 94.35,16.825 95.8,16.825 96.025,17.05 97.225,17.05 97.575,16.7 98.3,16.7 98.3,16.275 96.025,16.275 95.6,15.85 95.4,15.85 94.375,14.825 92.6,14.825 92.6,12.075 92.6,5.85 103.05,5.85 103.05,15.225 105.625,15.225 106.901,16.501 125.5,16.501 125.5,0.725 84.475,0.725 84.475,14.15
BUCK5V1_OUT on TOP_Layer "BUCK5V1_OUT_L01_P045" (solid, pour order 45): 120.025,22.725 121.7,24.4 121.7,26.125 121.175,26.65 119.125,26.65 119.125,27.15 121.875,27.15 122.7,26.325 122.7,23.775 123.8,22.675 123.8,17.9 123.6,17.7 110.1,17.7 109.5,18.3 109.5,21.89 110.892,22.725
BUCK6V_OUT on TOP_Layer "BUCK6V_OUT_L01_P043" (solid, pour order 43): 109.6,61.3 113.1,61.3 114.8,59.6 121.5,59.6 122.2,58.9 122.2,57.6 121.5,56.9 115.2,56.9 113.8,55.5 113.8,39.6 113.2,39 108.8,39 107.9,39.9 107.9,44.9 109.5,46.5 109.5,61.15
BUCK12V_OUT on TOP_Layer "BUCK12V_OUT_L01_P035" (solid, pour order 35): 110.5,77.6 123.3,77.6 124.1,76.8 124.1,72.8 123.7,72.4 113.1,72.4 112.2,71.5 110.3,71.5 109.6,72.2 109.6,76.8
BMS_VBAT_OUT on TOP_Layer "BMS_VBAT_OUT_L01_P032" (solid, pour order 32): 98.26,17.45 95.425,17.45 95.325,17.35 93.95,17.35 93.475,17.825 87.525,17.825 85.7,19.65 85.7,24.875 87.225,26.4 96.875,26.4 98.248,25.027
BMS_VBAT_OUT on TOP_Layer "BMS_VBAT_OUT_L01_P030" (solid, pour order 30): 91,48.225 90.975,48.25 90.975,50.725 91.55,51.3 91.55,56.775 90.95,57.375 85.775,57.375 85.075,56.675 85.075,51.95 85.875,51.15 88.5,51.15 89.2,50.45 89.2,48.225
BUCK6V_SW on TOP_Layer "BUCK6V_SW_L01_P024" (solid, pour order 24): 91.75,44.675 92.5,44.675 92.75,44.425 103.55,44.425 104.175,43.8 104.175,39.85 103.675,39.35 93.675,39.35 92.925,40.1 92.925,41.625 92.075,42.475 91.775,42.475 91.75,42.5
BUCK5V1_SW on TOP_Layer "BUCK5V1_SW_L01_P023" (solid, pour order 23): 97.95,17.2 100.225,17.2 100.8,17.775 100.8,19.8 100.425,20.175 98.875,20.175 98.875,21.825 99.475,22.425 105.025,22.425 105.425,22.025 105.425,17.65 104.25,16.475 99.15,16.475 98.675,16.95 97.95,16.95 97.9,17 97.9,17.15
AGND2 on TOP_Layer "AGND2_L01_P022" (solid, pour order 22): 95.025,12.675 95.9,12.675 96.1,12.475 96.1,10.75 95.85,10.5 93.7,10.5 93.7,11.599 94.95,12.5
AGND2 on TOP_Layer "AGND2_L01_P021" (solid, pour order 21): 98.087,15.6 98.225,15.6 98.275,15.55 98.275,14.85 98.65,14.475 100.325,14.475 100.65,14.15 100.65,12.975 100.45,12.775 99.875,12.775 99.4,13.25 98.425,13.25 98.425,14.275 98.025,14.675 98.025,15.558
AGND1 on TOP_Layer "AGND1_L01_P020" (solid, pour order 20): 95.025,67.375 95.875,67.375 96.025,67.225 96.025,66.1 96.025,65.325 95.775,65.075 93.55,65.075 93.55,66.418 94.253,67.265
AGND1 on TOP_Layer "AGND1_L01_P017" (solid, pour order 17): 97.975,70.3 98.225,70.3 98.225,69.5 98.575,69.15 100.3,69.15 100.475,68.975 100.475,67.55 100.325,67.4 99.425,67.4 99,67.825 98.35,67.825 98.2,67.975 98.2,69.05 97.975,69.275
BUCK12V_SW on TOP_Layer "BUCK12V_SW_L01_P016" (solid, pour order 16): 97.85,71.9 100.1,71.9 100.7,72.5 100.7,74.5 100.325,74.875 98.825,74.875 98.6,75.1 98.6,76.6 99.2,77.2 104.9,77.2 105.3,76.8 105.3,71.7 104.8,71.2 99.019,71.2 98.619,71.65 97.875,71.65 97.8,71.7 97.8,71.85
GND on TOP_Layer "GND_L01_P015" (solid, pour order 15): 64,74.5 65.4,74.5 67.1,72.8 74.7,72.8 76.6,74.7 76.6,83.4 75.2,84.8 65.05,84.8 63.85,83.6 63.85,74.6
BMS_VBAT_OUT_CAP on TOP_Layer "BMS_VBAT_OUT_CAP_L01_P014" (solid, pour order 14): 61.8,73.6 62.1,73.9 64.9,73.9 65.2,73.6 65.2,72.3 64.7,71.8 62.3,71.8 61.8,72.3
BMS_VBAT_OUT on TOP_Layer "BMS_VBAT_OUT_L01_P013" (solid, pour order 13): 36.095,75.205 35.9,75.029 35.9,69.7 39,66.6 39,66.2 39.6,65.6 45,65.6 45.5,65.1 45.5,63.9 45.8,63.6 46.6,63.6 46.9,63.9 46.9,72.6 46.7,72.8 38.2,72.8 37.2,73.8 37.2,74.9 36.903,75.197
MXC_P_F on TOP_Layer "MXC_P_F_L01_P008" (solid, pour order 8): 33.7,75 33.9,75.2 34.9,75.2 35,75.1 35,72.5 34.5,72 32.3,72 31.6,72.7 31.6,73.9 32.1,74.4 33.5,74.4 33.7,74.6
MXC_P_F on TOP_Layer "MXC_P_F_L01_P005" (solid, pour order 5): 13.6,66 14.3,66.7 20.5,66.7 22.4,68.6 22.4,72.2 23.1,72.9 26.3,72.9 26.4,72.8 26.4,63 25.3,61.9 14.1,61.9 13.6,62.4
MXC_P on TOP_Layer "MXC_P_L01_P004" (solid, pour order 4): 5.7,74.725 7.45,76.475 16.975,76.475 18.65,74.8 19.8,74.8 20.3,74.3 20.3,71.75 18.2,69.65 7.45,69.65 5.7,71.4
BM_BAT on TOP_Layer "BM_BAT_L01_P001" (solid, pour order 1): 22.8,51.6 22.6,51.4 22.6,45.2 22.8,45 24.1,45 24.3,45.2 24.3,51.4 24.1,51.6
BM_BREG_BJT_C on TOP_Layer "BM_BREG_BJT_C_L01_P000" (solid, pour order 0): 45.4,54.2 47,54.2 47.2,54 47.2,49.6 47.5,49.3 47.5,46.8 47.1,46.4 45.3,46.4 44.9,46.8 44.9,49.3 45.2,49.6 45.2,54
FET_CD on TOP_Layer "FET_CD_L01_P003" (solid, pour order 3): 22.8,73.3 22.4,73.7 22.4,81.9 25.3,84.8 48.4,84.8 51.5,81.7 51.5,77.6 50.9,77 49.5,77 48.6,76.1 48.6,73.5 48.4,73.3 43.1,73.3 42.8,73.6 42.175,74.225 39.25,74.225 38.175,75.3 38.175,78.525 37.075,79.625 33.85,79.625 32.725,78.5 32.725,76.35 31.775,75.4 29.9,75.4 27.8,73.3
BMS_VBAT_IN_CAP on TOP_Layer "BMS_VBAT_IN_CAP_L01_P002" (solid, pour order 2): 33.5,76.1 33.8,75.8 37.1,75.8 37.4,76.1 37.4,78.2 36.9,78.7 34,78.7 33.5,78.2
GND on BOTTOM_Layer "GND_L04_P067" (solid, remove dead copper, pour order 67): 30.25,0.5 30.25,23 36.75,23 36.75,37.25 41.25,37.25 41.25,42 55.25,42 55.25,85 125.75,85 125.75,0.5
VSS on BOTTOM_Layer "VSS_L04_P069" (solid, remove dead copper, pour order 69): 1.25,85 1.25,0.5 29.5,0.5 29.5,23.75 36,23.75 36,38 40.5,38 40.5,42.75 54.5,42.75 54.5,85
BMS_VBAT_OUT on BOTTOM_Layer "BMS_VBAT_OUT_L04_P028" (solid, pour order 28): 39.2,67.4 45.5,67.4 47,68.9 47,74.6 48.3,75.9 62,75.9 63,76.9 63,83.7 61.7,85 41.7,85 38.6,81.9 38.6,68
BMS_VBAT_OUT on BOTTOM_Layer "BMS_VBAT_OUT_L04_P033" (solid, remove dead copper, pour order 33): 88.1,19 94.2,19 96,20.8 96,35.3 93,38.3 85.5,38.3 83.175,40.625 83.175,47.975 85.5,50.3 89.95,50.3 91.4,51.75 91.4,71.6 94.4,74.6 94.4,78.1 93,79.5 87.25,79.5 84.975,77.225 84.975,61.075 83.4,59.5 78.3,59.5 77.1,58.3 77.1,28.8 79.812,26.088 85.712,26.088 87.4,24.4 87.4,19.5
AGND2 on BOTTOM_Layer "AGND2_L04_P041" (solid, pour order 41): 93.1,15.3 93.1,6.5 102.3,6.5 102.3,15.3
AGND1 on BOTTOM_Layer "AGND1_L04_P039" (solid, pour order 39): 93,70 93,61.4 102,61.4 102,70
BUCK12V_OUT on BOTTOM_Layer "BUCK12V_OUT_L04_P037" (solid, pour order 37): 110.5,77.9 124.3,77.9 125.73,76.47 125.73,62.43 124.2,60.9 118.8,60.9 117.4,62.3 117.4,64.6 116.1,65.9 111.4,65.9 108.8,68.5 108.8,76.8
MXC_P_F on BOTTOM_Layer "MXC_P_F_L04_P009" (solid, remove dead copper, pour order 9): 23.1,70.5 25.2,70.5 27.1,72.4 34.4,72.4 34.9,72.9 34.9,74.2 34.4,74.7 26.3,74.7 24.3,72.7 23.2,72.7 22.5,72 22.5,71 22.6,70.9
GND on INT2_GND "GND_L03_P068" (solid, remove dead copper, pour order 68): 30.25,0.5 30.25,23 36.75,23 36.75,37.25 41.25,37.25 41.25,42 55.25,42 55.25,85 125.75,85 125.75,0.5
VSS on INT2_GND "VSS_L03_P061" (solid, remove dead copper, pour order 61): 1.25,0.5 29.5,0.5 29.5,23.75 36,23.75 36,38 40.5,38 40.5,42.75 54.5,42.75 54.5,85 1.25,85
AGND1 on INT2_GND "AGND1_L03_P025" (solid, pour order 25): 93,70 102,70 102,61.4 93,61.4
AGND2 on INT2_GND "AGND2_L03_P026" (solid, pour order 26): 93.1,15.3 102.3,15.3 102.3,6.5 93.1,6.5
GND on INT1_GND "GND_L02_P065" (solid, remove dead copper, pour order 65): 30.25,0.5 30.25,23 36.75,23 36.75,37.25 41.25,37.25 41.25,42 55.25,42 55.25,85 125.75,85 125.75,0.5
VSS on INT1_GND "VSS_L02_P060" (solid, remove dead copper, pour order 60): 29.5,0.5 29.5,23.75 36,23.75 36,38 40.5,38 40.5,42.75 54.5,42.75 54.5,85 1.25,85 1.25,0.5
AGND2 on INT1_GND "AGND2_L02_P040" (solid, pour order 40): 93.1,15.3 93.1,6.5 102.3,6.5 102.3,15.3
AGND1 on INT1_GND "AGND1_L02_P038" (solid, pour order 38): 93,70 93,61.4 102,61.4 102,70

## Silkscreen, mask and mechanical layers (free items; w line width, h text height)
Top Overlay:
  lines w0.2: 9.6,79.3 11.6,79.3 ; 10.6,78.3 10.6,80.3 ; 59.1,74.8 61.1,74.8 ; 60.1,73.8 60.1,75.8 ; 85.85,76.05 87.85,76.05 ; 86.85,75.05 86.85,77.05
  text "BAT CHA" at 55.25,74.75 h1.5 r90
  text "BLDC OUT" at 71.5,71.25 h1.5
  text "12" at 126.05,61.7 h1.1 r90
  text "TS3" at 23.2,59.7 h1.1
  text "BATTERY" at 1.25,59 h1.5
  text "6" at 126.05,57.7 h1.1 r90
  text "SW" at 58,57 h1.5
  text "BOOT0" at 65.75,57 h1.5
  text "0" at 55.2,56.95 h1.1
  text "1" at 62.95,56.95 h1.1
  text "0" at 64.2,56.95 h1.1
  text "1" at 73.7,56.95 h1.1
  text "TS2" at 23.2,56.45 h1.1
  text "5" at 126.05,53.7 h1.1 r90
  text "TS1" at 23.2,53.2 h1.1
  text "GND" at 126.05,48.7 h1.1 r90
  text "NRST" at 57.5,44.5 h1.5
  text "5" at 126.05,42.7 h1.1 r90
  text "GND" at 126.05,37.2 h1.1 r90
  text "BALANCE" at 1.5,34 h1.5
  text "PORT" at 1.5,31.25 h1.5
  text "RPI OUTS" at 116.5,24.75 h1.5 r90
  text "UART" at 52.25,20.5 h1.5
  text "BATI2C" at 61.25,20.5 h1.5
  text "BMI2C" at 73,20.5 h1.5
  text "GND" at 49.95,17.95 h1.1
  text "RX" at 53.95,17.95 h1.1
  text "TX" at 56.95,17.95 h1.1
  text "GND" at 60.95,17.95 h1.1
  text "SD" at 64.95,17.95 h1.1
  text "SC" at 67.95,17.95 h1.1
  text "GND" at 72.2,17.95 h1.1
  text "SD" at 76.2,17.95 h1.1
  text "SC" at 79.2,17.95 h1.1
  text "SENSE RES" at 24.25,11.25 h1.5
  text "LEOv1" at 3.4,11.2 h3
  text "GND" at 67.05,7.2 h1.1 r90
  text "NRT" at 69.55,7.2 h1.1 r90
  text "SWO" at 72.05,7.2 h1.1 r90
  text "SCK" at 74.55,7.2 h1.1 r90
  text "SDO" at 77.05,7.2 h1.1 r90
  text "3V3" at 79.55,7.2 h1.1 r90
  text "GND" at 26.2,5.2 h1.1
  text "5V IN" at 24.2,2.7 h1.1
  text "EXT" at 50.95,1.45 h1.1
  text "REG" at 55.2,1.45 h1.1
  text "DBG" at 59.45,1.45 h1.1
  text "DEBUG" at 69,1.25 h1.5
Mechanical 1:
  lines w0.2: 0,1.27 ccw(c1.27,1.27) 1.27,0 125.73,0 ccw(c125.73,1.27) 127,1.27 127,84.23 ccw(c125.73,84.23) 125.73,85.5 105,85.5 1.27,85.5 ccw(c1.27,84.23) 0,84.23 0,1.27
Board Shape:
  lines w0.2: 0,1.27 ccw(c1.27,1.27) 1.27,0 125.73,0 ccw(c125.73,1.27) 127,1.27 127,84.23 ccw(c125.73,84.23) 125.73,85.5 10.5,85.5 1.27,85.5 ccw(c1.27,84.23) 0,84.23 0,1.27

## Text inside footprints (layer, text, board x,y; h text height)
D405: Top 3D Body "*" at 28.988,69.035 h1.27 r180
D406: Top 3D Body "*" at 49.388,69.035 h1.27 r180
D409: Top 3D Body "*" at 44.635,63.011 h1.27 r90
F401: Top 3D Body "RefDes2" at 14.965,71.022 h1.27 r270